# Altium PCB 2.PcbDoc (part 1 of 2)
Units mm, origin at the board's own origin, x right, y up, seen from the top; angles counter-clockwise.
Board outline 132.09 x 69.72 mm, 2 copper layers (Top Layer, Bottom Layer); 43 components, 58 nets, 220 pads, 0 vias.
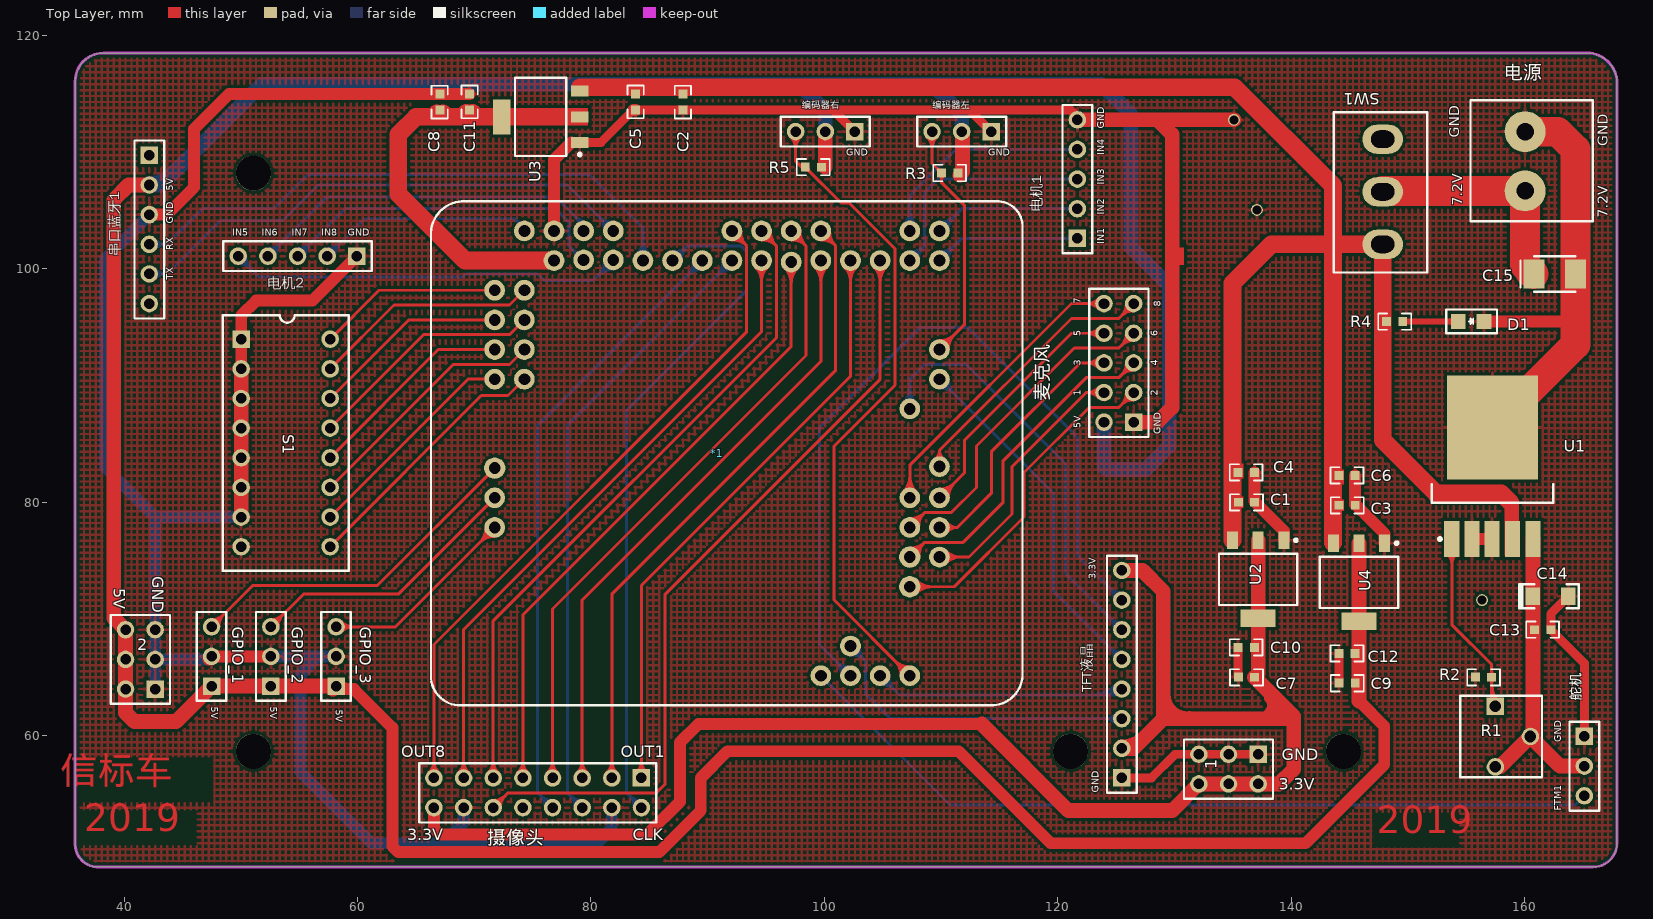
[diagram p0: Top Layer view]
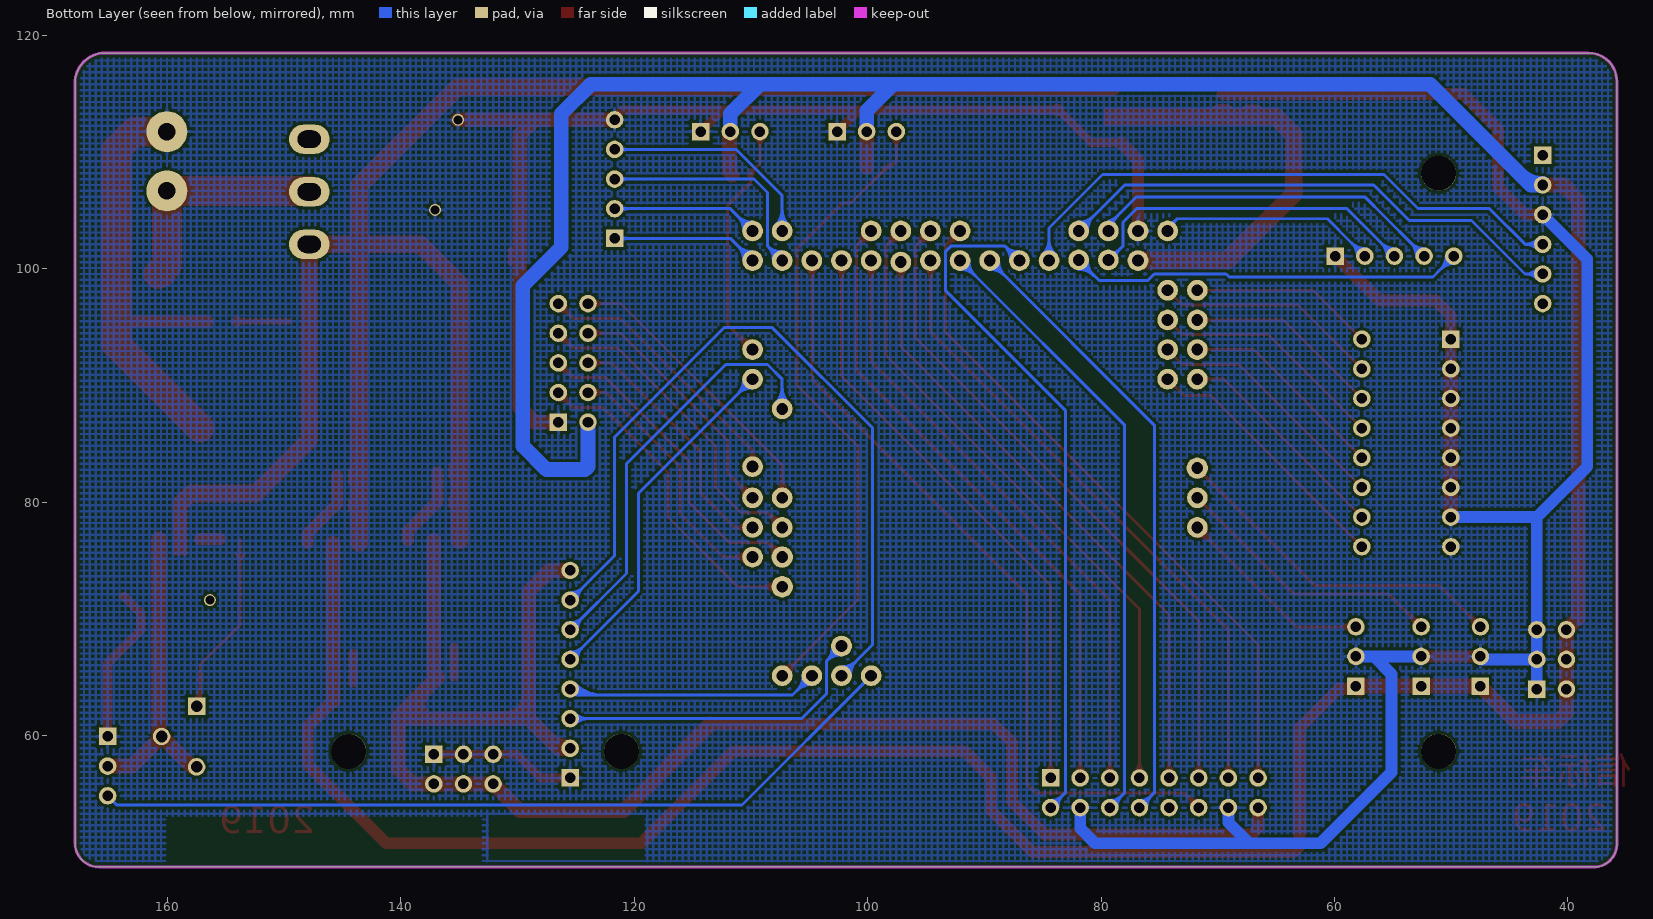
[diagram p1: Bottom Layer view, seen from below]

## Layer stack, top to bottom
Top Solder: solder mask 0.0102, Solder Resist, Dk 3.5
Top Layer: signal copper 0.0356
Dielectric1: dielectric 0.32, FR-4, Dk 4.8
Bottom Layer: signal copper 0.0356
Bottom Solder: solder mask 0.0102, Solder Resist, Dk 3.5

## Board outline
37.592,48.768 cw(c37.782,50.736) 35.814,50.927 35.814,116.078 cw(c38.227,116.078) 38.227,118.491 165.354,118.491 cw(c165.354,115.951) 167.894,115.951 167.894,50.8 cw(c165.862,50.8) 165.862,48.768 109.768,48.768

## Design rules (kind name [scope] priority, off if disabled: settings)
Clearance [All] p1: gap=0.254
PolygonConnect [All] p1: connectstyle=Relief reliefconductorwidth=0.254 reliefentries=4 polygonreliefangle="90 Angle" airgapwidth=0.254
RoutingVias [All] p1: holewidth=0.711 width=1.27 viastyle="Through Hole" minholewidth=0.711 minwidth=1.27 maxholewidth=25.4 maxwidth=25.4
SilkToSolderMaskClearance SilkscreenOverComponentPads [IsPad] p1: minsilkscreentomaskgap=0.152 clearancetoexposedcopper=TRUE
SolderMaskExpansion [All] p1: expansion=0.102
Width [All] p1: maxlimit=2.54 minlimit=0.203 preferedwidth=0.254
29 further rules are at their usual default settings.

## Components (designator, comment, footprint, x,y, rotation, side; value= is the part's Value field where it differs from the comment)
1 "Header 3X2" HDR2X3 137.16,58.42 r180 top
2 "Header 3X2" HDR2X3 42.672,64.008 r90 top
*1 "k60_184" k60_184 67.056,105.156 r270 top
C1 "22uF" 0603 136.144,80.01 r0 top
C2 "22uF" 0603 87.884,114.3 r270 top
C3 "22uF" 0603 144.78,79.756 r0 top
C4 "0.1uF" 0603 136.144,82.55 r180 top
C5 "0.1uF" 0603 83.82,114.3 r90 top
C6 "0.1uF" 0603 144.78,82.296 r180 top
C7 "0.1uF" 0603 136.144,65.024 r0 top
C8 "0.1uF" 0603 67.056,114.3 r270 top
C9 "0.1uF" 0603 144.78,64.516 r0 top
C10 "22uF" 0603 136.144,67.564 r180 top
C11 "22uF" 0603 69.596,114.3 r90 top
C12 "22uF" 0603 144.78,67.056 r180 top
C13 "0.1uF" 0603 161.544,69.088 r180 top
C14 "100uF" 1206钽 162.052,72.136 r180 top
C15 "Cap Pol" CAP-3528 162.56,99.568 r0 top
D1 "LED" LED2 155.448,95.504 r0 top
GPIO_1 "GPIO" HDR1X3 47.498,64.262 r90 top
GPIO_2 "GPIO" HDR1X3 52.578,64.262 r90 top
GPIO_3 "GPIO" HDR1X3 58.166,64.262 r90 top
R1 "RPot" VR_B1 157.48,59.944 r270 top
R2 "1K" 0603 156.464,65.024 r0 top
R3 "4.7k" 0603 110.744,108.204 r180 top
R4 "10K" 0603 148.844,95.504 r0 top
R5 "4.7k" 0603 99.06,108.712 r180 top
S1 "拨码开关" DIP16-KEY 53.848,85.09 r270 top
SW1 "SW-纽子" SW-纽子 147.828,102.108 r90 top
TFT液晶 "TFT液晶" HDR1X8 125.476,56.388 r90 top
U1 "LM2941" LM2941 158.496,82.296 r0 top
U2 "LM-1117  3.3" SOT220P700X180-4N 137.16,73.406 r270 top
U3 "LM-1117  5v" SOT220P700X180-4N 75.692,113.03 r180 top
U4 "LM-1117  5v" SOT220P700X180-4N 145.796,73.152 r270 top
串口蓝牙1 "Header 6" HDR1X6 42.164,109.728 r270 top
摄像头 "Header 8X2" HDR2X8 84.328,56.388 r180 top
电机1 "电机" HDR1X5 121.666,102.616 r90 top
电机2 "电机" HDR1X5 59.944,101.092 r180 top (schematic designator 电机)
电源 "电机" 接线端子 160.02,106.68 r180 top
编码器右 "Header 3" HDR1X3 102.616,111.76 r180 top
编码器左 "Header 3" HDR1X3 114.3,111.76 r180 top
舵机 "Header 3" HDR1X3 165.1,59.944 r270 top
麦克风 "Header 5X2" HDR2X5 126.492,86.868 r90 top

## Footprints (in the part's own frame and the unit in brackets; to place one, negate y for a bottom-side part, rotate by r counter-clockwise, add the part's x,y. Pads: shape width x height; smd on the part's side, far side on the other; paste and mask are expansions set on the pad)
0603 [mil]
  rect 30x30 smd: 1(-27,0) 2(27.5,-0.06)
  silkscreen extent -55,-28 56,27
1206钽 [mil]
  rect 50x60 smd: 1(54,7) 2(-66,7)
  silkscreen extent -101,-33 99,47
CAP-3528 [mm]
  rect 1.8x2.5 smd: 1(-1.778,0) 2(1.778,0)
  silkscreen extent -2.92,-1.52 1.78,1.52, body extent -1.91,-1.4 1.91,1.4, height 1.1
DIP16-KEY [mm]
  rect 1.5x1.5 hole 0.9: 1(-8.89,-3.81)
  round 1.5 hole 0.9: 2(-6.35,-3.81) 3(-3.81,-3.81) 4(-1.27,-3.81) 5(1.27,-3.81) 6(3.81,-3.81) 7(6.35,-3.81) 8(8.89,-3.81) 9(8.89,3.81) 10(6.35,3.81) 11(3.81,3.81) 12(1.27,3.81) 13(-1.27,3.81) 14(-3.81,3.81) 15(-6.35,3.81) 16(-8.89,3.81)
  silkscreen extent -10.94,-5.4 10.94,5.39
HDR1X3 [mm] "Connector; Header; 3 Position"
  rect 1.5x1.5 hole 0.9: 1(0,0)
  round 1.5 hole 0.9: 2(2.54,0) 3(5.08,0)
  silkscreen extent -1.27,-1.27 6.35,1.27
HDR1X5 [mm] "Connector; Header; 5 Pos"
  rect 1.5x1.5 hole 0.9: 1(0,0)
  round 1.5 hole 0.9: 2(2.54,0) 3(5.08,0) 4(7.62,0) 5(10.16,0)
  silkscreen extent -1.27,-1.27 11.43,1.27
HDR1X6 [mm] "Connector; Hea"
  rect 1.5x1.5 hole 0.9: 1(0,0)
  round 1.5 hole 0.9: 2(2.54,0) 3(5.08,0) 4(7.62,0) 5(10.16,0) 6(12.7,0)
  silkscreen extent -1.27,-1.27 13.97,1.27
HDR1X8 [mm] "Connector; Header; 8 Pos"
  rect 1.5x1.5 hole 0.9: 1(0,0)
  round 1.5 hole 0.9: 2(2.54,0) 3(5.08,0) 4(7.62,0) 5(10.16,0) 6(12.7,0) 7(15.24,0) 8(17.78,0)
  silkscreen extent -1.27,-1.27 19.05,1.27
HDR2X3 [mm] "Connector; Header; 3x2 Position"
  rect 1.5x1.5 hole 0.9: 1(0,0)
  round 1.5 hole 0.9: 2(0,2.54) 3(2.54,0) 4(2.54,2.54) 5(5.08,0) 6(5.08,2.54)
  silkscreen extent -1.27,-1.27 6.35,3.81
HDR2X5 [mm] "Connector; Header; 5"
  rect 1.5x1.5 hole 0.9: 1(0,0)
  round 1.5 hole 0.9: 2(0,2.54) 3(2.54,0) 4(2.54,2.54) 5(5.08,0) 6(5.08,2.54) 7(7.62,0) 8(7.62,2.54) 9(10.16,0) 10(10.16,2.54)
  silkscreen extent -1.27,-1.27 11.43,3.81
HDR2X8 [mm] "Connector; Header; 8"
  rect 1.5x1.5 hole 0.9: 1(0,0)
  round 1.5 hole 0.9: 2(0,2.54) 3(2.54,0) 4(2.54,2.54) 5(5.08,0) 6(5.08,2.54) 7(7.62,0) 8(7.62,2.54) 9(10.16,0) 10(10.16,2.54) 11(12.7,0) 12(12.7,2.54) 13(15.24,0) 14(15.24,2.54) 15(17.78,0) 16(17.78,2.54)
  silkscreen extent -1.27,-1.27 19.05,3.81
k60_184 [mil]
  round 70 hole 40: 0(175,1685) 1(75,1685) 2(175,1585) 3(75,1585) 4(175,1485) 5(175,1385) 6(75,1285) 7(175,1285) 8(75,1185) 9(180,1185) 10(75,1085) 11(175,1085) 12(75,985) 13(175,985) 14(175,885) 15(175,785) 16(175,685) 17(75,585) 18(75,385) 19(175,385) 20(275,185) 21(275,285) 22(375,185) 23(375,285) 24(475,185) 25(475,285) 26(575,185) 27(575,285) 29(975,185) 30(1075,185) 31(1575,1385) 32(1475,1385) 33(1575,1485) 34(1575,1585) 35(1175,1685) 37(1075,1685) 39(975,1685) 40(1075,1585) 41(975,1585) 42(870,1685) 43(575,1685) 44(675,1585) 45(475,1685) 46(1575,1285)
  round 72 hole 40: 28(875,185) 36(1275,1585) 38(1175,1585)
  silkscreen extent -25,-30 1675,1965
LED2 [mm]
  rect 1.27x1.27 smd: 1(-1.142,-0.002) 2(1.068,-0.002)
  silkscreen extent -2.18,-1.02 2.16,1.02
LM2941 [mm]
  rect 1.3x3.1 smd: 1(-4.746,-5.438) 2(-3.021,-5.438) 3(-1.295,-5.438) 4(0.455,-5.438) 5(2.206,-5.438)
  rect 7.8x8.9 smd: 6(-1.27,4.112)
  silkscreen extent -6.47,-5.56 3.93,-0.74, body extent -6.47,-2.34 3.93,6.56, height 4.65
SOT220P700X180-4N [mm] "SOT223, 4-Leads, Body 6.7"
  rect 1.5x0.95 smd: 1(-3.35,2.2) 2(-3.35,0) 3(-3.35,-2.2)
  rect 1.5x3 smd: 4(3.35,0)
  silkscreen extent -3.47,-3.35 2.2,3.35, body extent -1.86,-3.35 1.86,3.35, height 1.8
SW-纽子 [mm]
  oval 2.5x3.5 hole 1.5 slot 2 at 90 deg: 1(0,0) 2(4.5,0) 3(9,0)
  silkscreen extent -2.41,-3.81 11.3,4.19
VR_B1 [mm]
  rect 1.5x1.5 hole 1: 1(-2.6,0)
  round 1.5 hole 1: 2(0,3) 3(2.6,0)
  silkscreen extent -3.5,-3 3.5,4
接线端子 [mm]
  round 3.5 hole 1.5: 1(0,0) 2(0,-5.08)
  silkscreen extent -5.82,-7.77 4.67,2.59

## Part data
1 2: "Header, 3-Pin, Dual row"
C15: "极?"
GPIO_1 GPIO_2 GPIO_3: library part "Header 3", "Header, 3-Pin"
R1: "精密可调电阻"
S1: library part SW-DIP8, "8λֱ"
TFT液晶: library part "Header 8", "Header, 8-Pin"
U2 U3 U4: library part AMS-1117
串口蓝牙1: "Header, 6-Pin"
摄像头: "Header, 8-Pin, Dual row"
电机1 电机2: library part "Header 5", "Header, 5-Pin"
编码器右 编码器左 舵机: "Header, 3-Pin"
麦克风: "Header, 5-Pin, Dual row"

## Free pads (board coordinates)
  round 3 hole 3: 2(121.086,58.674) 2(144.454,58.674) 6(51.086,108.204) 7(51.086,58.674)
  round 1.016 hole 0.762: 3(137.057,105.051) 4(135.085,112.77) 5(156.337,71.628)
  round 1.778 hole 1.016: D4(81.915,100.771) D5(79.375,103.251) D6(79.375,100.771) D7(74.295,103.251)

## Nets (pads, with @x,y where several pads share a name; then routed paths per layer and width w, separated by ;. In a path a pad name is that pad's centre, name@x,y a point inside that pad or via, vN(x,y) a via of type N, cw(c..) or ccw(c..) an arc to the next point about the centre after c; other vN are vias at no path point)
3.3V: 1.2 1.4 1.6 C7.2 C10.1 TFT液晶.2 TFT液晶.8 U2.2 U2.4 摄像头.16 | length 147.3
  Top Layer w0.762: 129.286,63.5 ccw(c131.064,63.5) 131.289,61.736
  Top Layer w1.016: 摄像头.16@66.548,53.848 66.548,52.07 67.056,51.562 84.836,51.562 87.63,54.356 87.63,59.436 89.194,61 113.498,61 ; 138.176,61.976 ccw(c137.541,62.611) 138.176,63.246
  Top Layer w1.27: 113.498,61 120.904,53.594 129.794,53.594 1.6@132.08,55.88 1.4@134.62,55.88 1.2@137.16,55.88 138.938,55.88 140.208,57.15 140.208,61.657 C7.2@136.843,65.022 ; TFT液晶.2@125.476,58.928 126.492,58.928 129.032,61.468 ; TFT液晶.8@125.476,74.168 127.254,74.168 129.032,72.39 129.032,61.468 ; C7.2@137.16,65.34 U2.4@137.16,70.056 U2.2@137.16,76.756 ; 140.019,61.468 129.032,61.468 ; TFT液晶.2@125.476,59.043 ccw(c125.476,61.773) 127.407,59.843 cw(c125.476,61.773) TFT液晶.2@125.476,59.043
5V: 2.2 2.4 2.6 C9.2 C12.1 GPIO_1.1 GPIO_2.1 GPIO_3.1 R3.1 R5.1 U4.2 U4.4 串口蓝牙1.2 编码器右.2 编码器左.2 麦克风.2 | length 354.1
  Top Layer w1.016: GPIO_3.1@57.912,64.008 59.69,64.008 62.992,60.706 62.992,50.546 63.5,50.038 85.852,50.038 89.408,53.594 89.408,56.388 91.694,58.674 111.506,58.674 119.38,50.8 141.224,50.8 147.955,57.531 147.955,60.833 145.796,62.992 ; GPIO_3.1@58.337,64.433 ccw(c59.363,65.459) 59.363,64.008 cw(c59.363,65.459) GPIO_3.1@58.337,64.433
  Top Layer w1.27: 串口蓝牙1.2@42.164,107.188 40.386,107.188 39.116,105.918 39.116,70.104 2.6@40.132,69.088 2.4@40.132,66.548 2.2@40.132,64.008 40.132,61.976 40.894,61.214 44.45,61.214 GPIO_1.1@47.498,64.262 GPIO_2.1@52.578,64.262 GPIO_3.1@58.166,64.262 GPIO_3.1@57.912,64.008 ; R5.1@100.076,108.712 编码器右.2@100.076,111.76 ; 编码器左.2@111.76,111.76 111.823,111.697 111.823,108.318 ; 145.796,62.992 U4.4@145.796,69.802 U4.2@145.796,76.502 ; R3.1@111.609,108.024 ccw(c111.093,108.541) 111.823,108.541 cw(c111.093,108.541) R3.1@111.609,108.024
  Bottom Layer w1.27: 串口蓝牙1.2@42.164,107.188 43.188,107.188 51.824,115.824 97.79,115.824 ; 编码器右.2@100.076,111.76 100.076,113.538 97.79,115.824 ; 编码器左.2@111.76,111.76 111.76,113.284 109.22,115.824 ; 麦克风.2@123.952,86.868 123.952,83.058 124.206,82.804 127.508,82.804 129.54,84.836 129.54,98.552 126.238,101.854 126.238,113.284 123.698,115.824 109.22,115.824 ; 97.79,115.824 109.22,115.824 ; 串口蓝牙1.2@42.164,107.303 ccw(c42.164,110.053) 44.108,108.108 cw(c42.164,110.053) 串口蓝牙1.2@42.164,107.303
5V_1: *1.19 C8.2 C11.1 U3.2 U3.4 | length 36.9
  Top Layer w1.524: U3.4@72.342,113.03 69.596,113.03 65.024,113.03 63.5,111.506 63.5,106.426 69.215,100.711 *1.19@76.835,100.711 ; 66.594,113.03 ccw(c66.594,114.061) 67.324,113.332 cw(c66.594,114.061) 66.594,113.03 ; C8.2@66.785,113.332 ccw(c67.514,114.061) 67.514,113.03 cw(c67.514,114.061) C8.2@66.785,113.332 ; 69.105,113.03 ccw(c69.105,114.105) 69.865,113.345 cw(c69.105,114.105) 69.105,113.03 ; C11.1@69.327,113.345 ccw(c70.087,114.105) 70.087,113.03 cw(c70.087,114.105) C11.1@69.327,113.345
6V: C13.2 C14.1 R1.2 R1.3 U1.5 舵机.2 | length 27.6
  Top Layer w1.27: R1.3@157.88,57.344 R1.2@160.48,59.944 163.02,57.404 舵机.2@165.1,57.404 ; R1.2@160.702,59.944 160.702,71.958 U1.5@160.702,76.858 ; R1.3@157.48,57.309 ccw(c157.48,58.19) 158.103,57.567 cw(c157.48,58.19) R1.3@157.48,57.309
7.2V: C1.1 C2.1 C3.1 C4.2 C5.2 C6.2 R4.1 SW1.1 U1.4 U2.3 U3.3 U4.3 | length 164.8
  Top Layer w1.524: U3.3@79.042,115.57 135.128,115.57 143.561,107.137 143.561,102.108 ; U2.3@134.96,76.756 134.96,98.765 138.303,102.108 143.561,102.108 ; U4.3@143.561,76.537 143.561,102.108 ; 158.75,80.01 157.988,80.772 152.4,80.772 147.828,85.344 SW1.1@147.828,102.108 143.561,102.108
CLK: *1.15 摄像头.2 | length 76.3
  Bottom Layer w0.254: 摄像头.2@84.328,53.848 83.058,55.118 83.058,87.884 93.345,98.171 93.345,101.473 92.837,101.981 88.265,101.981 ; *1.15@86.995,100.711 88.265,101.981 ; 83.264,54.912 cw(c82.201,53.848) 83.705,53.848 ccw(c82.201,53.848) 83.264,54.912 ; 83.264,54.912 ccw(c84.328,55.975) 84.328,54.471 cw(c84.328,55.975) 83.264,54.912 ; 83.698,54.478 cw(c83.068,53.848) 83.959,53.848 ccw(c83.068,53.848) 83.698,54.478 ; 83.698,54.478 ccw(c84.328,55.108) 84.328,54.217 cw(c84.328,55.108) 83.698,54.478 ; 87.842,101.558 cw(c87.024,102.376) 87.004,101.219 ccw(c87.024,102.376) 87.842,101.558 ; 87.842,101.558 ccw(c88.66,100.74) 87.503,100.72 cw(c88.66,100.74) 87.842,101.558 ; 88.265,101.981 cw(c87.038,103.208) 87.008,101.473 ccw(c87.038,103.208) 88.265,101.981 ; 88.265,101.981 ccw(c89.492,100.754) 87.757,100.724 cw(c89.492,100.754) 88.265,101.981
CS: *1.31 TFT液晶.7 | length 84.6
  Bottom Layer w0.254: *1.31@102.235,65.151 99.568,67.818 99.568,86.36 108.204,94.996 112.268,94.996 121.666,85.598 121.666,75.438 TFT液晶.7@125.476,71.628 ; 100.934,66.452 cw(c99.633,65.151) 101.473,65.151 ccw(c99.633,65.151) 100.934,66.452 ; 100.934,66.452 ccw(c102.235,67.753) 102.235,65.913 cw(c102.235,67.753) 100.934,66.452 ; 101.368,66.018 cw(c100.501,65.151) 101.727,65.151 ccw(c100.501,65.151) 101.368,66.018 ; 101.368,66.018 ccw(c102.235,66.885) 102.235,65.659 cw(c102.235,66.885) 101.368,66.018 ; 124.412,72.692 cw(c123.349,71.628) 124.853,71.628 ccw(c123.349,71.628) 124.412,72.692 ; 124.412,72.692 ccw(c125.476,73.755) 125.476,72.251 cw(c125.476,73.755) 124.412,72.692 ; 124.846,72.258 cw(c124.216,71.628) 125.107,71.628 ccw(c124.216,71.628) 124.846,72.258 ; 124.846,72.258 ccw(c125.476,72.888) 125.476,71.997 cw(c125.476,72.888) 124.846,72.258
DC: *1.44 TFT液晶.6 | length 53.3
  Bottom Layer w0.254: *1.44@107.315,88.011 107.315,90.551 108.585,91.821 112.141,91.821 120.65,83.312 120.65,73.914 TFT液晶.6@125.476,69.088 ; 107.315,89.237 cw(c106.089,89.237) 106.956,88.37 ccw(c106.089,89.237) 107.315,89.237 ; 107.315,89.237 ccw(c108.541,89.237) 107.674,88.37 cw(c108.541,89.237) 107.315,89.237 ; 107.315,89.851 cw(c105.475,89.851) 106.776,88.55 ccw(c105.475,89.851) 107.315,89.851 ; 107.315,89.851 ccw(c109.155,89.851) 107.854,88.55 cw(c109.155,89.851) 107.315,89.851 ; 124.412,70.152 cw(c123.349,69.088) 124.853,69.088 ccw(c123.349,69.088) 124.412,70.152 ; 124.412,70.152 ccw(c125.476,71.215) 125.476,69.711 cw(c125.476,71.215) 124.412,70.152 ; 124.846,69.718 cw(c124.216,69.088) 125.107,69.088 ccw(c124.216,69.088) 124.846,69.718 ; 124.846,69.718 ccw(c125.476,70.348) 125.476,69.457 cw(c125.476,70.348) 124.846,69.718
FTM1: *1.46 舵机.3 | length 70.3
  Bottom Layer w0.254: *1.46@99.695,65.151 110.761,54.085 164.321,54.085 舵机.3@165.1,54.864
FTM2: *1.45 R3.2 编码器左.3 | length 41.7
  Top Layer w0.254: 编码器左.3@109.22,111.76 109.22,109.031 R3.2@110.045,108.206 110.045,107.379 112.014,105.41 112.014,95.25 *1.45@109.855,93.091 ; 109.22,110.256 cw(c110.724,110.256) 109.661,111.319 ccw(c110.724,110.256) 109.22,110.256 ; 109.22,110.256 ccw(c107.716,110.256) 108.779,111.319 cw(c107.716,110.256) 109.22,110.256 ; 109.22,110.869 cw(c110.111,110.869) 109.481,111.499 ccw(c110.111,110.869) 109.22,110.869 ; 109.22,110.869 ccw(c108.329,110.869) 108.959,111.499 cw(c108.329,110.869) 109.22,110.869 ; 109.612,108.639 cw(c109.178,108.206) 109.791,108.206 ccw(c109.178,108.206) 109.612,108.639 ; 109.612,108.639 ccw(c110.045,109.073) 110.045,108.46 cw(c110.045,109.073) 109.612,108.639 ; 110.045,107.592 cw(c110.659,107.592) 110.225,108.026 ccw(c110.659,107.592) 110.045,107.592 ; 110.045,107.592 ccw(c109.432,107.592) 109.866,108.026 cw(c109.432,107.592) 110.045,107.592 ; 110.722,93.958 cw(c109.855,94.825) 109.855,93.599 ccw(c109.855,94.825) 110.722,93.958 ; 110.722,93.958 ccw(c111.589,93.091) 110.363,93.091 cw(c111.589,93.091) 110.722,93.958 ; 111.156,94.392 cw(c109.855,95.693) 109.855,93.853 ccw(c109.855,95.693) 111.156,94.392 ; 111.156,94.392 ccw(c112.457,93.091) 110.617,93.091 cw(c112.457,93.091) 111.156,94.392
GND: 1.1 1.3 1.5 2.1 2.3 2.5 *1.18 C1.2 C2.2 C3.2 C4.1 C5.1 C6.1 C7.1 C8.1 C9.1 C10.2 C11.2 C12.2 C13.1 C14.2 C15.2 D1.2 GPIO_1.2 GPIO_2.2 GPIO_3.2 pad.3 pad.4 R2.1 S1.1 S1.2 S1.3 S1.4 S1.5 S1.6 S1.7 S1.8 TFT液晶.1 U1.2 U1.3 U1.6 U2.1 U3.1 U4.1 串口蓝牙1.3 摄像头.4 摄像头.14 电机1.5 电机2.1 电源.2 编码器右.1 编码器左.1 舵机.1 麦克风.1 | length 363.4
  Top Layer w0.762: U3.1@79.042,110.83 80.858,110.83 C5.1@83.642,113.614 ; C5.1@83.82,113.614 C2.2@87.87,113.614 ; C2.2@87.882,113.602 100.774,113.602 ; 编码器右.1@102.616,111.76 100.774,113.602 ; 编码器左.1@114.3,111.76 112.459,113.602 ; 电机1.5@121.92,112.776 121.094,113.602 112.459,113.602 ; TFT液晶.1@125.476,56.388 128.016,56.388 130.048,58.42 1.5@132.08,58.42 1.3@134.62,58.42 1.1@137.16,58.42 ; C7.1@135.445,65.037 C10.2@135.445,67.566 ; C9.1@144.082,64.529 C12.2@144.082,67.058 ; C14.2@163.728,71.958 162.23,70.46 C13.1@162.23,69.088 165.1,66.218 舵机.1@165.1,59.944 ; 100.774,113.602 112.459,113.602
  Top Layer w1.016: 串口蓝牙1.3@42.164,104.648 43.648,104.648 46,107 46,112 48.998,114.998 C11.2@69.598,114.998 ; GPIO_1.2@47.244,66.548 GPIO_1.2@47.498,66.802 GPIO_2.2@52.578,66.802 ; S1.2@50.038,91.44 S1.1@50.038,93.98 50.038,96.012 51.308,97.282 56.134,97.282 电机2.1@59.944,101.092 ; *1.18@76.835,103.251 76.835,109.347 U3.1@78.318,110.83 ; C5.1@83.642,113.614 C5.1@83.82,113.614 ; C4.1@136.83,82.55 136.83,80.086 139.36,77.556 U2.1@139.36,76.756 ; C6.1@145.466,82.296 145.466,79.832 147.996,77.302 U4.1@147.996,76.502 ; U1.2@155.475,76.858 U1.3@157.201,76.858 ; D1.2@156.516,95.502 164.336,95.502
  Top Layer w1.27: S1.7@50.038,78.74 S1.6@50.038,81.28 S1.5@50.038,83.82 S1.4@50.038,86.36 S1.3@50.038,88.9 S1.2@50.038,91.44 ; 电机1.5@121.92,112.776 127.248,112.776 ; 麦克风.1@126.492,86.868 128.524,86.868 129.794,88.138 129.794,111.506 128.53,112.77 ; 127.248,112.77 128.53,112.77 ; pad.4@135.085,112.77 128.53,112.77
  Top Layer w2.54: U1.6@157.226,86.408 164.338,93.52 C15.2@164.338,99.568 164.338,110.236 162.814,111.76 电源.2@160.02,111.76
  Bottom Layer w1.016: 串口蓝牙1.3@42.164,104.648 38.354,100.838 38.354,83.058 42.672,78.74 ; 2.1@42.672,64.008 2.3@42.672,66.548 ; GPIO_1.2@47.498,66.802 47.244,66.548 2.3@42.672,66.548 ; S1.7@50.038,78.74 42.672,78.74 ; GPIO_2.2@52.578,66.802 56.642,66.802 ; GPIO_3.2@58.166,66.802 56.642,66.802 ; 摄像头.14@69.088,53.848 69.088,52.578 67.31,50.8 ; 摄像头.4@81.788,53.848 81.788,52.07 80.518,50.8 67.31,50.8 ; 2.3@42.672,66.548 2.5@42.672,69.088 42.672,78.74 ; 56.642,66.802 55.118,65.278 55.118,56.882 61.2,50.8 67.31,50.8
IN1: *1.0 电机1.1 | length 30
  Bottom Layer w0.254: *1.0@109.855,100.711 111.76,102.616 电机1.1@121.92,102.616 ; 110.722,101.578 cw(c109.855,102.445) 109.855,101.219 ccw(c109.855,102.445) 110.722,101.578 ; 110.722,101.578 ccw(c111.589,100.711) 110.363,100.711 cw(c111.589,100.711) 110.722,101.578 ; 111.156,102.012 cw(c109.855,103.313) 109.855,101.473 ccw(c109.855,103.313) 111.156,102.012 ; 111.156,102.012 ccw(c112.457,100.711) 110.617,100.711 cw(c112.457,100.711) 111.156,102.012 ; 120.416,102.616 cw(c120.416,101.112) 121.479,102.175 ccw(c120.416,101.112) 120.416,102.616 ; 120.416,102.616 ccw(c120.416,104.12) 121.479,103.057 cw(c120.416,104.12) 120.416,102.616 ; 电机1.1@121.029,102.616 cw(c121.029,101.725) 121.659,102.355 ccw(c121.029,101.725) 电机1.1@121.029,102.616 ; 电机1.1@121.029,102.616 ccw(c121.029,103.507) 121.659,102.877 cw(c121.029,103.507) 电机1.1@121.029,102.616
IN2: *1.1 电机1.2 | length 30
  Bottom Layer w0.254: *1.1@109.855,103.251 111.76,105.156 电机1.2@121.92,105.156 ; 110.722,104.118 cw(c109.855,104.985) 109.855,103.759 ccw(c109.855,104.985) 110.722,104.118 ; 110.722,104.118 ccw(c111.589,103.251) 110.363,103.251 cw(c111.589,103.251) 110.722,104.118 ; 111.156,104.552 cw(c109.855,105.853) 109.855,104.013 ccw(c109.855,105.853) 111.156,104.552 ; 111.156,104.552 ccw(c112.457,103.251) 110.617,103.251 cw(c112.457,103.251) 111.156,104.552 ; 120.416,105.156 cw(c120.416,103.652) 121.479,104.715 ccw(c120.416,103.652) 120.416,105.156 ; 120.416,105.156 ccw(c120.416,106.66) 121.479,105.597 cw(c120.416,106.66) 120.416,105.156 ; 电机1.2@121.029,105.156 cw(c121.029,104.265) 121.659,104.895 ccw(c121.029,104.265) 电机1.2@121.029,105.156 ; 电机1.2@121.029,105.156 ccw(c121.029,106.047) 121.659,105.417 cw(c121.029,106.047) 电机1.2@121.029,105.156
IN3: *1.2 电机1.3 | length 37
  Bottom Layer w0.254: *1.2@107.315,100.711 108.585,101.981 ; 电机1.3@121.92,107.696 109.728,107.696 108.585,106.553 108.585,101.981 ; 108.162,101.558 cw(c107.344,102.376) 107.324,101.219 ccw(c107.344,102.376) 108.162,101.558 ; 108.162,101.558 ccw(c108.98,100.74) 107.823,100.72 cw(c108.98,100.74) 108.162,101.558 ; 108.585,101.981 cw(c107.358,103.208) 107.328,101.473 ccw(c107.358,103.208) 108.585,101.981 ; 108.585,101.981 ccw(c109.812,100.754) 108.077,100.724 cw(c109.812,100.754) 108.585,101.981 ; 120.416,107.696 cw(c120.416,106.192) 121.479,107.255 ccw(c120.416,106.192) 120.416,107.696 ; 120.416,107.696 ccw(c120.416,109.2) 121.479,108.137 cw(c120.416,109.2) 120.416,107.696 ; 电机1.3@121.029,107.696 cw(c121.029,106.805) 121.659,107.435 ccw(c121.029,106.805) 电机1.3@121.029,107.696 ; 电机1.3@121.029,107.696 ccw(c121.029,108.587) 121.659,107.957 cw(c121.029,108.587) 电机1.3@121.029,107.696
IN4: *1.3 电机1.4 | length 36.4
  Bottom Layer w0.254: *1.3@107.315,103.251 107.315,106.299 111.252,110.236 电机1.4@121.92,110.236 ; 107.315,104.477 cw(c106.089,104.477) 106.956,103.61 ccw(c106.089,104.477) 107.315,104.477 ; 107.315,104.477 ccw(c108.541,104.477) 107.674,103.61 cw(c108.541,104.477) 107.315,104.477 ; 107.315,105.091 cw(c105.475,105.091) 106.776,103.79 ccw(c105.475,105.091) 107.315,105.091 ; 107.315,105.091 ccw(c109.155,105.091) 107.854,103.79 cw(c109.155,105.091) 107.315,105.091 ; 120.416,110.236 cw(c120.416,108.732) 121.479,109.795 ccw(c120.416,108.732) 120.416,110.236 ; 120.416,110.236 ccw(c120.416,111.74) 121.479,110.677 cw(c120.416,111.74) 120.416,110.236 ; 电机1.4@121.029,110.236 cw(c121.029,109.345) 121.659,109.975 ccw(c121.029,109.345) 电机1.4@121.029,110.236 ; 电机1.4@121.029,110.236 ccw(c121.029,111.127) 121.659,110.497 cw(c121.029,111.127) 电机1.4@121.029,110.236
IN5: pad.D4 电机2.5 | length 51.6
  Bottom Layer w0.254: pad.D4@81.915,100.771 80.131,98.987 79.321,98.987 77.7,98.987 76.527,98.987 76.019,98.987 75.438,99.568 69.278,99.568 69.025,99.314 57.213,99.314 55.166,99.314 52.594,99.314 51.562,99.314 50.958,99.918 ; 50.524,100.352 cw(c51.391,101.219) 50.165,101.219 ccw(c51.391,101.219) 50.524,100.352 ; 50.524,100.352 ccw(c49.657,99.485) 49.657,100.711 cw(c49.657,99.485) 50.524,100.352 ; 50.958,99.918 cw(c52.259,101.219) 50.419,101.219 ccw(c52.259,101.219) 50.958,99.918 ; 50.958,99.918 ccw(c49.657,98.617) 49.657,100.457 cw(c49.657,98.617) 50.958,99.918 ; 80.614,99.41 ccw(c79.313,100.711) 81.153,100.711 cw(c79.313,100.711) 80.614,99.41 ; 80.614,99.41 cw(c81.915,98.109) 81.915,99.949 ccw(c81.915,98.109) 80.614,99.41 ; 81.048,99.844 ccw(c80.181,100.711) 81.407,100.711 cw(c80.181,100.711) 81.048,99.844 ; 81.048,99.844 cw(c81.915,98.977) 81.915,100.203 ccw(c81.915,98.977) 81.048,99.844
IN6: pad.D5 电机2.4 | length 45.8
  Bottom Layer w0.254: 53.34,102.108 55.626,104.394 57.404,106.172 76.962,106.172 78.582,104.552 ; 78.709,104.425 ccw(c80.01,105.726) pad.D5@79.52,103.952 ; pad.D5@79.318,104.102 cw(c79.883,105.853) 78.582,104.552 ; 53.064,101.832 cw(c52.197,102.699) 52.197,101.473 ccw(c52.197,102.699) 53.064,101.832 ; 53.064,101.832 ccw(c53.931,100.965) 52.705,100.965 cw(c53.931,100.965) 53.064,101.832 ; 53.498,102.266 cw(c52.197,103.567) 52.197,101.727 ccw(c52.197,103.567) 53.498,102.266 ; 53.498,102.266 ccw(c54.799,100.965) 52.959,100.965 cw(c54.799,100.965) 53.498,102.266 ; 78.582,104.552 cw(c77.281,103.251) 79.121,103.251 ccw(c77.281,103.251) 78.582,104.552 ; 79.016,104.118 cw(c78.149,103.251) pad.D5@79.375,103.251 ccw(c78.149,103.251) 79.016,104.118 ; 79.016,104.118 ccw(c79.883,104.985) 79.883,103.759 cw(c79.883,104.985) 79.016,104.118
IN7: pad.D6 电机2.3 | length 45.6
  Bottom Layer w0.254: 78.486,101.6 78.105,101.981 78.105,104.013 76.962,105.156 58.928,105.156 56.038,102.266 ; 55.604,101.832 ccw(c56.471,100.965) 55.245,100.965 cw(c56.471,100.965) 55.604,101.832 ; 55.604,101.832 cw(c54.737,102.699) 54.737,101.473 ccw(c54.737,102.699) 55.604,101.832 ; 56.038,102.266 ccw(c57.339,100.965) 55.499,100.965 cw(c57.339,100.965) 56.038,102.266 ; 56.038,102.266 cw(c54.737,103.567) 54.737,101.727 ccw(c54.737,103.567) 56.038,102.266 ; 78.328,101.758 ccw(c79.629,103.059) 79.629,101.219 cw(c79.629,103.059) 78.328,101.758 ; 78.328,101.758 cw(c77.027,100.457) 78.867,100.457 ccw(c77.027,100.457) 78.328,101.758 ; pad.D6@78.762,101.324 ccw(c79.629,102.191) 79.629,100.965 cw(c79.629,102.191) pad.D6@78.762,101.324 ; pad.D6@78.762,101.324 cw(c77.895,100.457) 79.121,100.457 ccw(c77.895,100.457) pad.D6@78.762,101.324
IN8: pad.D7 电机2.2 | length 35
  Bottom Layer w0.254: 58.144,101.832 cw(c57.277,102.699) 57.277,101.473 ccw(c57.277,102.699) 58.144,101.832 ; 58.144,101.832 ccw(c59.011,100.965) 57.785,100.965 cw(c59.011,100.965) 58.144,101.832 ; 58.578,102.266 cw(c57.277,103.567) 57.277,101.727 ccw(c57.277,103.567) 58.578,102.266 ; 58.578,102.266 ccw(c59.879,100.965) 58.039,100.965 cw(c59.879,100.965) 58.578,102.266 ; 58.578,102.266 60.61,104.298 73.48,104.298 ; 73.48,104.298 ccw(c74.781,105.599) 74.781,103.759 cw(c74.781,105.599) 73.48,104.298 ; 73.48,104.298 cw(c72.18,102.997) 74.019,102.997 ccw(c72.18,102.997) 73.48,104.298 ; pad.D7@73.914,103.864 ccw(c74.781,104.731) 74.781,103.505 cw(c74.781,104.731) pad.D7@73.914,103.864 ; pad.D7@73.914,103.864 cw(c73.047,102.997) 74.273,102.997 ccw(c73.047,102.997) pad.D7@73.914,103.864
KEY_0: *1.20 S1.16 | length 15.8
  Top Layer w0.254: S1.16@57.658,93.98 61.849,98.171 *1.20@71.755,98.171
KEY_1: *1.21 S1.15 | length 19.4
  Top Layer w0.254: S1.15@57.658,91.44 63.119,96.901 73.025,96.901 *1.21@74.295,98.171
KEY_2: *1.22 S1.14 | length 16.9
  Top Layer w0.254: S1.14@57.658,88.9 64.389,95.631 *1.22@71.755,95.631
KEY_3: *1.23 S1.13 | length 20.5
  Top Layer w0.254: S1.13@57.658,86.36 65.659,94.361 73.025,94.361 *1.23@74.295,95.631
KEY_4: *1.24 S1.12 | length 17.9
  Top Layer w0.254: S1.12@57.658,83.82 66.929,93.091 *1.24@71.755,93.091
KEY_5: *1.25 S1.11 | length 21.5
  Top Layer w0.254: S1.11@57.658,81.28 68.199,91.821 73.025,91.821 *1.25@74.295,93.091
KEY_6: *1.26 S1.10 | length 19
  Top Layer w0.254: S1.10@57.658,78.74 69.469,90.551 *1.26@71.755,90.551
KEY_7: *1.27 S1.9 | length 22.6
  Top Layer w0.254: S1.9@57.658,76.2 70.612,89.154 72.898,89.154 *1.27@74.295,90.551
LPTMR: *1.34 R5.2 编码器右.3 | length 88.7
  Top Layer w0.254: 编码器右.3@97.536,111.76 97.536,109.22 98.042,108.714 R5.2@98.361,108.714 ; 105.664,66.802 *1.34@107.315,65.151 100.838,71.628 100.838,84.836 106.045,90.043 106.045,101.727 102.108,105.664 101.411,105.664 R5.2@98.361,108.714 ; 97.536,110.256 cw(c99.04,110.256) 97.977,111.319 ccw(c99.04,110.256) 97.536,110.256 ; 97.536,110.256 ccw(c96.032,110.256) 97.095,111.319 cw(c96.032,110.256) 97.536,110.256 ; 97.536,110.869 cw(c98.427,110.869) 97.797,111.499 ccw(c98.427,110.869) 97.536,110.869 ; 97.536,110.869 ccw(c96.645,110.869) 97.275,111.499 cw(c96.645,110.869) 97.536,110.869 ; R5.2@98.361,108.714 cw(c98.221,109.05) 97.964,108.792 ccw(c98.221,109.05) R5.2@98.361,108.714 ; 98.795,108.28 cw(c99.229,108.714) 98.615,108.714 ccw(c99.229,108.714) 98.795,108.28 ; 98.795,108.28 ccw(c98.361,107.846) 98.361,108.46 cw(c98.361,107.846) 98.795,108.28 ; 106.014,66.452 cw(c104.713,65.151) *1.34@106.553,65.151 ; 106.014,66.452 ccw(c107.315,67.753) *1.34@107.315,65.913 ; 106.014,66.452 cw(c104.713,65.151) *1.34@106.553,65.151 ; 106.014,66.452 ccw(c107.315,67.753) *1.34@107.315,65.913 ; 106.014,66.452 cw(c104.713,65.151) *1.34@106.553,65.151 ; 106.014,66.452 ccw(c107.315,67.753) *1.34@107.315,65.913 ; 106.014,66.452 cw(c104.713,65.151) *1.34@106.553,65.151 ; 106.014,66.452 ccw(c107.315,67.753) *1.34@107.315,65.913 ; 106.448,66.018 cw(c105.581,65.151) *1.34@106.807,65.151 ; 106.448,66.018 ccw(c107.315,66.885) *1.34@107.315,65.659 ; 106.448,66.018 cw(c105.581,65.151) *1.34@106.807,65.151 ; 106.448,66.018 ccw(c107.315,66.885) *1.34@107.315,65.659 ; 106.448,66.018 cw(c105.581,65.151) *1.34@106.807,65.151 ; 106.448,66.018 ccw(c107.315,66.885) *1.34@107.315,65.659 ; 106.448,66.018 cw(c105.581,65.151) *1.34@106.807,65.151 ; 106.448,66.018 ccw(c107.315,66.885) *1.34@107.315,65.659 ; 97.696,109.06 ccw(c98.064,109.428) 98.264,108.948 cw(c98.064,109.428) 97.696,109.06